# EAGLE board altair_brd (EAGLE 9.7.0)
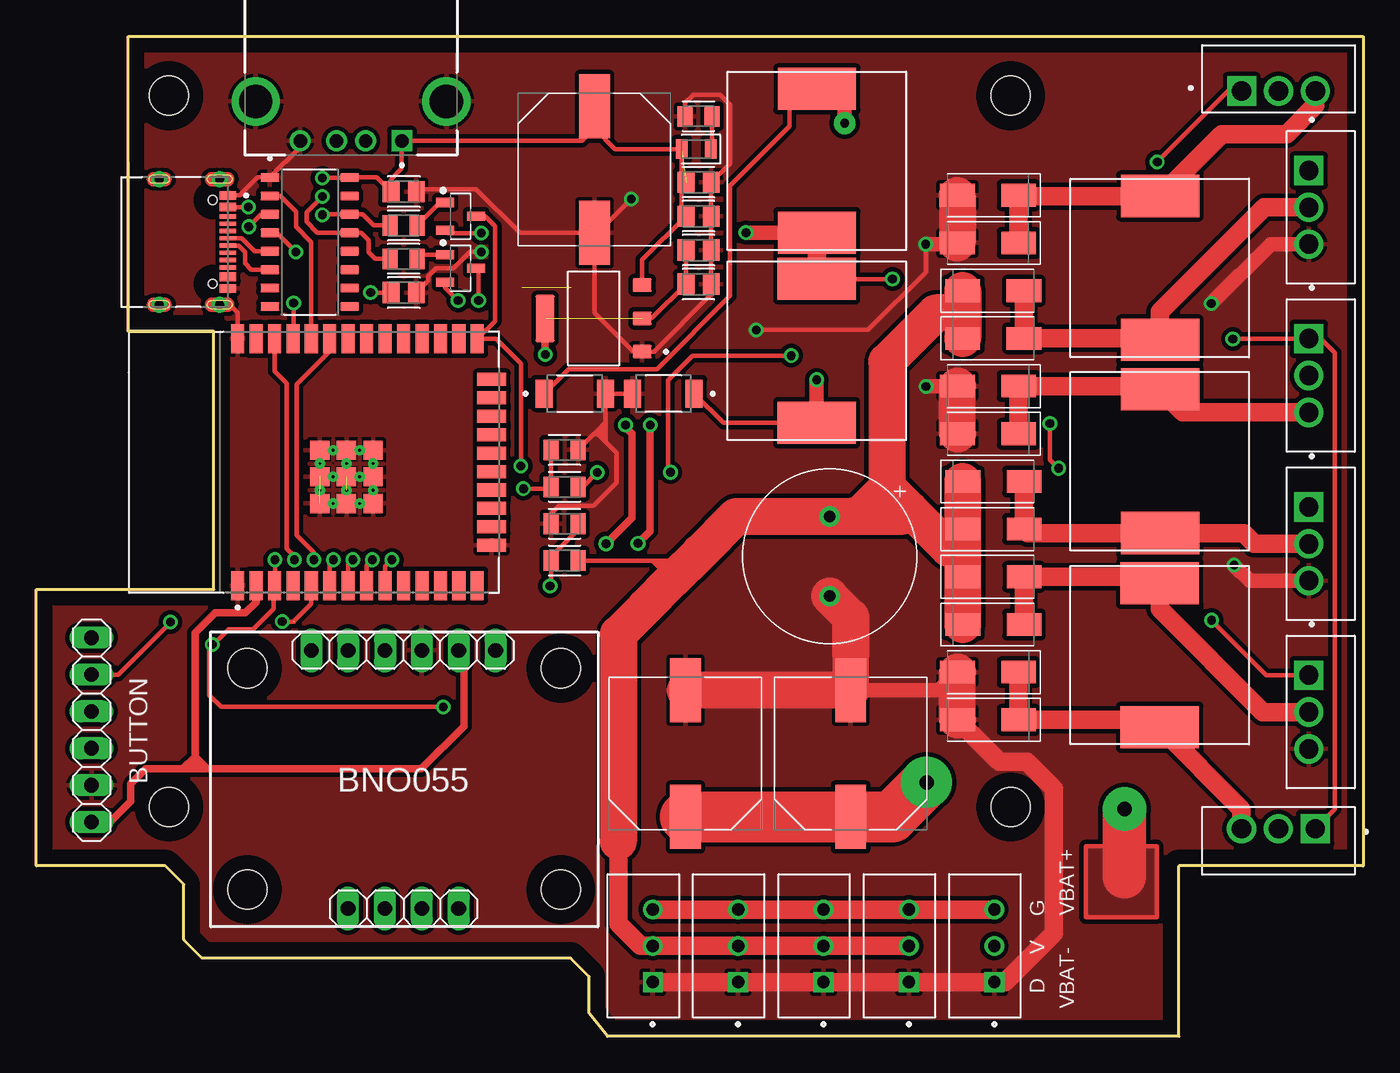
[diagram p0: board, top side]
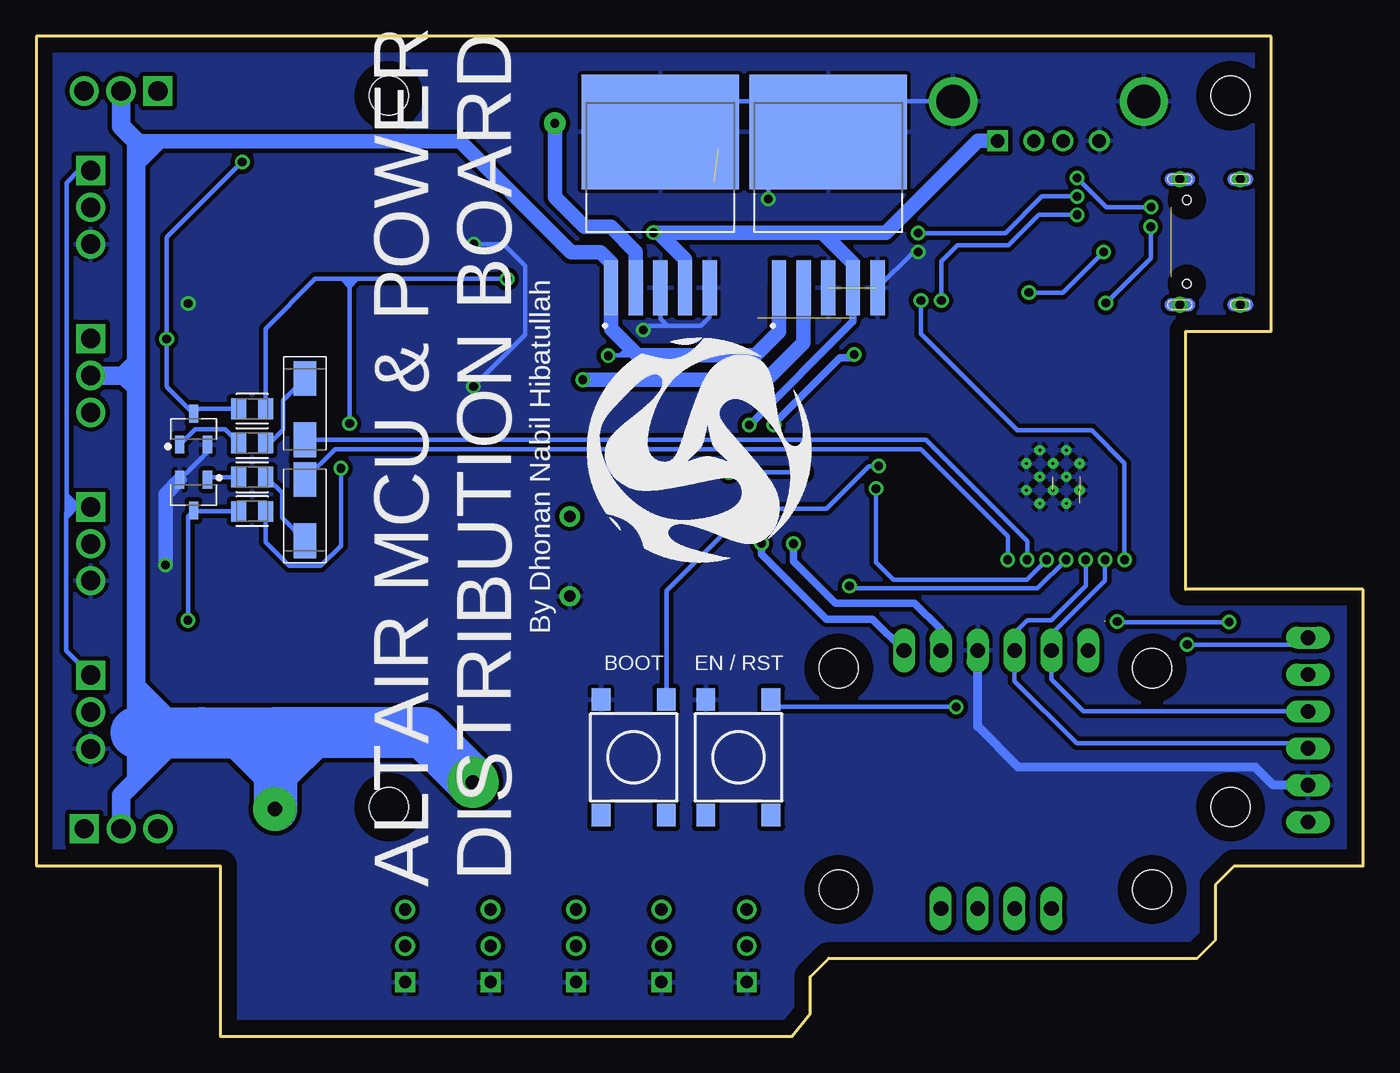
[diagram p1: board, bottom side, seen from below]

Size 91.44 x 68.9 mm. Coordinates in mm from the lower left corner, seen from the top.
Outline: 8.89,11.75 0,11.75 0,30.8 12.23,30.8 12.23,48.58 6.35,48.58 6.35,68.9 91.44,68.9 91.44,11.75 78.74,11.75 78.74,0 39.35,0 38.1,1.59 38.1,4.13 36.83,5.4 11.43,5.4 10.16,6.67 10.16,10.48 8.89,11.75
Copper layers (1*16): Top 0.035mm / dielectric 1.5mm / Bottom 0.035mm
Design rules "default": minimum track width 6mil, minimum drill 0.35mm, track to track 6mil, track to pad 6mil, pad to pad 6mil, via to via 6mil, smd to smd 6mil, copper to edge 40mil, drill to drill 6mil, minimum pad ring 10mil, minimum via ring 8mil, stop-mask expansion 4mil, vias tented up to drill 0mil, thermal gap 10mil
Holes 2.7 mm at 9.14,15.81 67.14,15.81 9.14,64.81 67.14,64.81 14.55,25.37 14.55,10.13 36.14,10.13 36.14,25.37

## Footprints (pad centres in the part's own frame; a part is rotated, then mirrored left to right if it is on the bottom)
CAPAE1030X1050N = smd 4.416 x 2.115: 1 -4.353,0; 2 4.353,0
CAPC2012X110 = smd 1.165 x 1.465: 1 -0.875,0; 2 0.875,0
CAPPRD550W60D1200H2000B = drill 0.8 pad 1.4: 1 -2.75,0; 2 2.75,0
SODFL4725X110N = smd 1.17 x 1.92: A 2.125,0; C -2.125,0
DIOM5226X290N = smd 2.392 x 1.565: 1 -2.108,0; 2 2.108,0
HRO_TYPE-C-31-M-12 = smd 0.6 x 1.14: A1_B12 -3.2,4.75; A4_B9 -2.4,4.75; B1_A12 3.2,4.75; B4_A9 2.4,4.75 | smd 0.3 x 1.14: A5 -1.25,4.75; A6 -0.25,4.75; A7 0.25,4.75; A8 1.25,4.75; B5 1.75,4.75; B6 0.75,4.75; B7 -0.75,4.75; B8 -1.75,4.75 | drill 0.6 pad 0.9: S1 -4.325,4.17; S2 4.325,4.17; S3 -4.325,0; S4 4.325,0 | hole 0.6: -2.89,3.68; 2.89,3.68
SAMTEC_USB-A-S-X-X-TH = drill 0.92 square: 01 -3.5,2.71 | drill 0.92: 02 -1,2.71; 03 1,2.71; 04 3.5,2.71 | drill 2.3: S1 -6.57,0; S2 6.57,0
MOLEX_22-03-5035 = drill 0.85 pad 1.28 square: 1 0,0 | drill 0.85 pad 1.28: 2 2.5,0; 3 5,0
1X06 = drill 1.016 long: 1 -6.35,0; 2 -3.81,0; 3 -1.27,0; 4 1.27,0; 5 3.81,0; 6 6.35,0
1X04 = drill 1.016 long: 1 -3.81,0; 2 -1.27,0; 3 1.27,0; 4 3.81,0
CDRH127R = smd 2.9 x 5.4: P$1 -1.27,0; P$2 8.634,0
LEDC2012X110N_G = smd 0.817 x 1.352: 1 -1,0 | smd 0.822 x 1.352: 2 0.998,0
TO254P1052X465X1989-3 = drill 1.34 pad 2.01 square: 1 0,0 | drill 1.34 pad 2.01: 2 2.54,0; 3 5.08,0
SOT95P237X112-3N = smd 1.224 x 0.625: 1 -1.064,0.95; 2 -1.064,-0.95; 3 1.064,0
RESC2012X65 = smd 1.031 x 1.42: 1 -0.919,0; 2 0.919,0
TACTILE_SWITCH_SMD_6.2MM_TALL = smd 1.55 x 1.3: A1 -3.975,-2.25; A2 3.975,-2.25; B1 -3.975,2.25; B2 3.975,2.25
MODULE_ESP32-WROOM-32D = smd 2 x 0.9: 1 -8.5,5.26; 2 -8.5,3.99; 3 -8.5,2.72; 4 -8.5,1.45; 5 -8.5,0.18; 6 -8.5,-1.09; 7 -8.5,-2.36; 8 -8.5,-3.63; 9 -8.5,-4.9; 10 -8.5,-6.17; 11 -8.5,-7.44; 12 -8.5,-8.71; 13 -8.5,-9.98; 14 -8.5,-11.25; 25 8.5,-11.25; 26 8.5,-9.98; 27 8.5,-8.71; 28 8.5,-7.44; 29 8.5,-6.17; 30 8.5,-4.9; 31 8.5,-3.63; 32 8.5,-2.36; 33 8.5,-1.09; 34 8.5,0.18; 35 8.5,1.45; 36 8.5,2.72; 37 8.5,3.99; 38 8.5,5.26 | smd 0.9 x 2: 15 -5.715,-12.25; 16 -4.445,-12.25; 17 -3.175,-12.25; 18 -1.905,-12.25; 19 -0.635,-12.25; 20 0.635,-12.25; 21 1.905,-12.25; 22 3.175,-12.25; 23 4.445,-12.25; 24 5.715,-12.25 | smd 1.33 x 1.33: 39_1 -2.835,-0.405; 39_2 -1,-0.405; 39_3 0.835,-0.405; 39_4 -2.835,-2.24; 39_5 -1,-2.24; 39_6 0.835,-2.24; 39_7 -2.835,-4.075; 39_8 -1,-4.075; 39_9 0.835,-4.075 | drill 0.2 pad 0.3: 39_10 -1.917,-0.405; 39_11 -0.083,-0.405; 39_12 -2.835,-1.323; 39_13 -1,-1.323; 39_14 0.835,-1.323; 39_15 -1.917,-2.24; 39_16 -0.083,-2.24; 39_17 -2.835,-3.158; 39_18 -1,-3.158; 39_19 0.835,-3.158; 39_20 -1.917,-4.075; 39_21 -0.083,-4.075
SOT229P700X180-4N = smd 1.31 x 0.93: 1 -3.345,2.29; 2 -3.345,0; 3 -3.345,-2.29 | smd 1.31 x 3.24: 4 3.345,0
SOIC127P600X180-16N = smd 1.31 x 0.62: 1 -2.75,4.445; 2 -2.75,3.175; 3 -2.75,1.905; 4 -2.75,0.635; 5 -2.75,-0.635; 6 -2.75,-1.905; 7 -2.75,-3.175; 8 -2.75,-4.445; 9 2.75,-4.445; 10 2.75,-3.175; 11 2.75,-1.905; 12 2.75,-0.635; 13 2.75,0.635; 14 2.75,1.905; 15 2.75,3.175; 16 2.75,4.445
TO170P1524X483-6N = smd 3.79 x 0.99: 1 -6.4,3.4; 2 -6.4,1.7; 3 -6.4,0; 4 -6.4,-1.7; 5 -6.4,-3.4 | smd 7.88 x 10.84: 6 4.35,0

## Placement (x,y rotation side)
C1  470u  [CAPAE1030X1050N]  56.12,19.49 90 top
C2  470u  [CAPAE1030X1050N]  44.73,19.49 90 top
C3  470u  [CAPAE1030X1050N]  38.46,59.71 270 top
C4  10u  [CAPC2012X110]  45.64,58.85 0 top
C5  100n  [CAPC2012X110]  45.64,56.51 0 top
C6  10u  [CAPC2012X110]  45.64,54.17 0 top
C7  100n  [CAPC2012X110]  45.64,51.83 0 top
C8  4.7m  [CAPPRD550W60D1200H2000B]  54.67,33.08 270 top
C9  100n  [CAPC2012X110]  25.32,51.24 0 top
C10  4.7u  [CAPC2012X110]  25.32,58.2 0 top
D1  1N5824  [SODFL4725X110N]  43.21,44.28 180 top
D2  1N5824  [SODFL4725X110N]  37.11,44.28 0 top
D3  SR5100  [DIOM5226X290N]  65.58,57.95 180 top
D4  SR5100  [DIOM5226X290N]  65.58,54.66 180 top
D5  SR5100  [DIOM5226X290N]  65.58,44.8 180 top
D6  SR5100  [DIOM5226X290N]  65.58,41.52 180 top
D7  SR5100  [DIOM5226X290N]  65.58,25.1 180 top
D8  SR5100  [DIOM5226X290N]  65.58,21.82 180 top
D9  SR5100  [DIOM5226X290N]  65.95,51.38 0 top
D10  SR5100  [DIOM5226X290N]  65.95,48.09 0 top
D11  SR5100  [DIOM5226X290N]  65.96,38.23 0 top
D12  SR5100  [DIOM5226X290N]  65.96,34.95 0 top
D13  SR5100  [DIOM5226X290N]  65.96,31.67 0 top
D14  SR5100  [DIOM5226X290N]  65.96,28.38 0 top
D15  1N5819  [DIOM5226X290N]  72.93,43.21 270 bottom
D16  1N5819  [DIOM5226X290N]  72.93,36.26 90 bottom
J1  TYPE-C-31-M-12  [HRO_TYPE-C-31-M-12]  8.47,54.73 270 top
J2  USB-A-S-X-X-TH  [SAMTEC_USB-A-S-X-X-TH]  21.69,64.41 180 top
J3  22-03-5035  [MOLEX_22-03-5035]  66.02,3.74 90 top
J4  22-03-5035  [MOLEX_22-03-5035]  42.47,3.74 90 top
J5  22-03-5035  [MOLEX_22-03-5035]  48.36,3.74 90 top
J6  22-03-5035  [MOLEX_22-03-5035]  54.25,3.74 90 top
J7  22-03-5035  [MOLEX_22-03-5035]  60.13,3.74 90 top
JP1  PINHD-1X6  [1X06]  25.3,26.59 180 top
JP2  PINHD-1X4  [1X04]  25.3,8.81 0 top
JP3  PINHD-1X6  [1X06]  3.81,21.12 90 top
L1  33u  [CDRH127R]  53.78,43.55 90 top
L2  33u  [CDRH127R]  53.79,64.01 270 top
L3  330u  [CDRH127R]  77.43,56.63 270 top
L4  330u  [CDRH127R]  77.43,43.31 270 top
L5  330u  [CDRH127R]  77.41,22.58 90 top
LED1  LED_CHIPGREEN-2012  [LEDC2012X110N_G]  45.48,61.13 180 top
Q1  IRF9540  [TO254P1052X465X1989-3]  83.06,65.13 0 top
Q2  IRF9540  [TO254P1052X465X1989-3]  87.69,48.07 270 top
Q3  IRF9540  [TO254P1052X465X1989-3]  88.14,14.31 180 top
Q4  IRF9540  [TO254P1052X465X1989-3]  87.69,59.66 270 top
Q5  IRF9540  [TO254P1052X465X1989-3]  87.69,36.48 270 top
Q6  IRF9540  [TO254P1052X465X1989-3]  87.69,24.89 270 top
Q7  NPN  [SOT95P237X112-3N]  29.24,52.91 0 top
Q8  NPN  [SOT95P237X112-3N]  29.24,56.5 0 top
Q9  NPN  [SOT95P237X112-3N]  80.6,41.84 90 bottom
Q10  NPN  [SOT95P237X112-3N]  80.6,37.29 270 bottom
R1  470  [RESC2012X65]  45.64,63.39 180 top
R2  300k  [RESC2012X65]  36.41,32.78 180 top
R3  47k  [RESC2012X65]  36.41,35.32 180 top
R4  300k  [RESC2012X65]  36.41,37.86 180 top
R5  47k  [RESC2012X65]  36.41,40.4 0 top
R6  10k  [RESC2012X65]  25.32,53.57 0 top
R7  10k  [RESC2012X65]  25.32,55.87 0 top
R8  5k  [RESC2012X65]  76.56,40.88 180 bottom
R9  5k  [RESC2012X65]  76.56,38.53 180 bottom
R10  10k  [RESC2012X65]  76.56,36.18 0 bottom
R11  10k  [RESC2012X65]  76.56,43.24 0 bottom
S1  MOMENTARY-SWITCH-SPST-SMD-6.2MM-TALL  [TACTILE_SWITCH_SMD_6.2MM_TALL]  43.05,19.23 90 bottom
S2  MOMENTARY-SWITCH-SPST-SMD-6.2MM-TALL  [TACTILE_SWITCH_SMD_6.2MM_TALL]  50.28,19.23 90 bottom
U1  ESP32-WROOM-32D  [MODULE_ESP32-WROOM-32D]  19.14,39.55 90 top
U2  AMS1117-3.3  [SOT229P700X180-4N]  38.4,49.46 180 top
U3  CH340C  [SOIC127P600X180-16N]  18.85,54.73 0 top
VR1  LM2596S-5.0  [TO170P1524X483-6N]  36.86,57.96 90 bottom
VR2  LM2596S-5.0  [TO170P1524X483-6N]  48.44,57.96 90 bottom

## Library data of the parts
C1-C10 = Capacitor; CATEGORY: Capacitor
D1 D2 = MY-SS54; AVAILABILITY: In Stock; CHECK_PRICES: https://www.snapeda.com/parts/SS54FSH/Taiwan+Semiconductor/view-part/?ref=eda; DESCRIPTION: 5A, 40V, Schottky Rectifier; MF: Taiwan Semiconductor; MP: SS54FSH; PACKAGE: SOD-128-2 Taiwan Semiconductor; PRICE: None; SNAPEDA_LINK: https://www.snapeda.com/parts/SS54FSH/Taiwan+Semiconductor/view-part/?ref=snap
D3-D14 = Diode; CATEGORY: Diode; SUB-CATEGORY: Zener
D15 D16 = Diode; CATEGORY: Diode; SUB-CATEGORY: Rectifier
J1 = MY-USB-TYPE-C; AVAILABILITY: Not in stock; CHECK_PRICES: https://www.snapeda.com/parts/TYPE-C-31-M-12/HRO+Electronics+Co.%252C+Ltd./view-part/?ref=eda; DESCRIPTION: USB Connectors 24 Receptacle 1 8.94*7.3mm RoHS; MF: HRO Electronics Co., Ltd.; MP: TYPE-C-31-M-12; PACKAGE: Package; PRICE: None; SNAPEDA_LINK: https://www.snapeda.com/parts/TYPE-C-31-M-12/HRO+Electronics+Co.%252C+Ltd./view-part/?ref=snap
J2 = MY-USB-TYPE-A; AVAILABILITY: In Stock; CHECK_PRICES: https://www.snapeda.com/parts/USB-A-S-S-W-TH/Samtec+Inc./view-part/?ref=eda; DESCRIPTION: USB-A (USB TYPE-A) USB 2.0 Receptacle Connector 4 Position Through Hole, Right Angle; MF: Samtec; MP: USB-A-S-S-W-TH; PACKAGE: None; PRICE: None; SNAPEDA_LINK: https://www.snapeda.com/parts/USB-A-S-S-W-TH/Samtec+Inc./view-part/?ref=snap
J3-J7 = MOLEX-22-03-5035; AVAILABILITY: In Stock; CHECK_PRICES: https://www.snapeda.com/parts/22-03-5035/Molex/view-part/?ref=eda; DESCRIPTION: Conn Shrouded Header HDR 3 POS 2.5mm Solder ST Thru-Hole Bag | Molex Incorporated 22-03-5035; MF: Molex; MP: 22-03-5035; PACKAGE: None; PRICE: None; PURCHASE-URL: https://www.snapeda.com/api/url_track_click_mouser/?unipart_id=451887&manufacturer=Molex&part_name=22-03-5035&search_term=22-03-5035; SNAPEDA_LINK: https://www.snapeda.com/parts/22-03-5035/Molex/view-part/?ref=snap
JP1 JP3 = Connector; CATEGORY: Headers; DESCRIPTION: Header, Straight, 6 Position; MANUFACTURER: Generic; MPN: Generic; OPERATING_TEMPERATURE: Generic; PART_STATUS: Active; PITCH: 0.100" (2.54mm); ROHS_COMPLIANCE: Generic; SERIES: Generic; SUB-CATEGORY: Headers, Male Pins; TYPE: Board to Board or Cable, Unshrouded, Through Hole, Straight
JP2 = Connector; CATEGORY: Headers; DESCRIPTION: Header, Straight, 4 Position; MANUFACTURER: Generic; MPN: Generic; OPERATING_TEMPERATURE: Generic; PART_STATUS: Active; PITCH: 0.100" (2.54mm); ROHS_COMPLIANCE: Generic; SERIES: Generic; SUB-CATEGORY: Headers, Male Pins; TYPE: Board to Board or Cable, Unshrouded, Through Hole, Straight
L1-L5 = MY-CDRH127R
LED1 = Tutorial - Fusion 360; CATEGORY: Opto-Electronic; COLOR: Green; SUB-CATEGORY: LED
Q1-Q6 = MY-IRF9540; AVAILABILITY: In Stock; CHECK_PRICES: https://www.snapeda.com/parts/IRF9540/Vishay+Siliconix/view-part/?ref=eda; DESCRIPTION: P-Channel 100 V 19A (Tc) 3.7W (Ta), 150W (Tc) Surface Mount D²PAK (TO-263); MF: Vishay Siliconix; MP: IRF9540; PACKAGE: TO-220-3 Vishay; PRICE: None; PURCHASE-URL: https://www.snapeda.com/api/url_track_click_mouser/?unipart_id=1087953&manufacturer=Vishay Siliconix&part_name=IRF9540&search_term=None; SNAPEDA_LINK: https://www.snapeda.com/parts/IRF9540/Vishay+Siliconix/view-part/?ref=snap
Q7-Q10 = Transistor; CATEGORY: Transistor; SUB-CATEGORY: BJT; TYPE: NPN
R1-R11 = Resistor; CATEGORY: Resistor; SUB-CATEGORY: Fixed
S1 S2 = SparkFun-Switches; PROD_ID: SWCH-11966; SF_SKU: COM-12992
U1 = MY-ESP32-WROOM-32D; AVAILABILITY: In Stock; CHECK_PRICES: https://www.snapeda.com/parts/ESP32-WROOM-32D/Espressif+Systems/view-part/?ref=eda; DESCRIPTION: Bluetooth, WiFi 802.11b/g/n, Bluetooth v4.2 +EDR, Class 1, 2 and 3 Transceiver Module 2.4GHz ~ 2.5GHz Integrated; MF: Espressif Systems; MP: ESP32-WROOM-32D; PACKAGE: Non Standard Espressif Systems; PRICE: None; SNAPEDA_LINK: https://www.snapeda.com/parts/ESP32-WROOM-32D/Espressif+Systems/view-part/?ref=snap
U2 = MY-AMS1117; AVAILABILITY: Not in stock; CHECK_PRICES: https://www.snapeda.com/parts/AMS1117-3.3/Advanced+Monolithic+Systems/view-part/?ref=eda; DESCRIPTION: Sot223/Pkg 1-Amp 3.3-Volt Low Drop Out Voltage Regulatator; MF: Advanced Monolithic Systems; MP: AMS1117-3.3; PACKAGE: SOT-223 Seeed Technology; PRICE: None; SNAPEDA_LINK: https://www.snapeda.com/parts/AMS1117-3.3/Advanced+Monolithic+Systems/view-part/?ref=snap
U3 = MY-CH340C; AVAILABILITY: Not in stock; CHECK_PRICES: https://www.snapeda.com/parts/CH340C/WCH/view-part/?ref=eda; DESCRIPTION: USB to serial chip CH340; MF: WCH; MP: CH340C; PACKAGE: None; PRICE: None; SNAPEDA_LINK: https://www.snapeda.com/parts/CH340C/WCH/view-part/?ref=snap
VR1 VR2 = MY-LM2596S; AVAILABILITY: In Stock; CHECK_PRICES: https://www.snapeda.com/parts/LM2596S-5.0/NOPB/Texas+Instruments/view-part/?ref=eda; DESCRIPTION: SIMPLE SWITCHER&reg; 4.5V to 40V, 3A Low Component Count Step-Down Regulator; MF: Texas Instruments; MP: LM2596S-5.0/NOPB; PACKAGE: TO-263-5 Texas Instruments; PRICE: None; SNAPEDA_LINK: https://www.snapeda.com/parts/LM2596S-5.0/NOPB/Texas+Instruments/view-part/?ref=snap

## Nets
3V3: C6.1 C7.1 JP1.2 JP3.1 U1.2 U2.2 U2.4
5V: C3.1 C4.1 C5.1 C10.1 J1.A4_B9 J1.B4_A9 J2.01 JP1.1 L1.P$2 L2.P$2 LED1.2 R10.2 R11.2 U2.3 U3.16 VR1.4 VR2.4
14V: C8.1 D9.1 D10.1 D11.1 D12.1 D13.1 D14.1 J4.2 J5.2 J6.2 J7.2 R2.1
BTN_INT: JP3.5 U1.5
DATA: J3.3 J4.3 J5.3 J6.3 J7.3
ESP_EN: JP3.6 Q7.3 S1.A2 U1.3
ESP_IO0: Q8.3 S2.A2 U1.25
ESP_RX: U1.34 U3.2
ESP_TX: U1.35 U3.3
GND: C1.2 C2.2 C3.2 C4.2 C5.2 C6.2 C7.2 C8.2 C9.2 C10.2 D1.A D2.A D3.2 D4.2 D5.2 D6.2 D7.2 D8.2 J1.A1_B12 J1.B1_A12 J1.S1 J1.S2 J1.S3 J1.S4 J2.04 J2.S1 J2.S2 J3.1 J4.1 J5.1 J6.1 J7.1 JP1.3 JP3.2 Q4.3 Q5.3 Q6.3 Q9.2 Q10.2 R1.2 R3.2 R5.2 S1.B2 S2.B2 U1.1 U1.15 U1.38 U1.39_1 U1.39_2 U1.39_3 U1.39_4 U1.39_5 U1.39_6 U1.39_7 U1.39_8 U1.39_9 U1.39_10 U1.39_11 U1.39_12 U1.39_13 U1.39_14 U1.39_15 U1.39_16 U1.39_17 U1.39_18 U1.39_19 U1.39_20 U1.39_21 U2.1 U3.1 VR1.3 VR1.5 VR1.6 VR2.3 VR2.5 VR2.6
N$1: D1.C L1.P$1 VR1.2
N$2: LED1.1 R1.1
N$3: D3.1 D4.1 L3.P$1 Q1.3
N$4: D2.C L2.P$1 VR2.2
N$5: D5.1 D6.1 L4.P$1 Q2.3
N$6: D7.1 D8.1 L5.P$1 Q3.3
N$7: D9.2 D10.2 L3.P$2 Q4.2
N$8: D11.2 D12.2 L4.P$2 Q5.2
N$9: D13.2 D14.2 L5.P$2 Q6.2
N$10: R4.2 R5.1 U1.7
N$11: R2.2 R3.1 U1.6
N$12: C9.1 U3.4
N$13: J1.A6 U3.5
N$14: J1.A7 U3.6
N$15: Q7.2 R7.1 U3.14
N$16: Q8.2 R6.1 U3.13
N$17: Q7.1 R6.2
N$18: Q8.1 R7.2
N$19: D15.2 U1.8
N$20: D15.1 R8.1
N$21: D16.2 U1.9
N$22: D16.1 R9.1
N$23: Q10.1 R9.2
N$24: Q9.1 R8.2
S_BOOST: Q4.1 Q5.1 Q6.1 Q10.3 R10.1
S_BUCK: Q1.1 Q2.1 Q3.1 Q9.3 R11.1
SCL: JP1.5 JP3.4 U1.36
SDA: JP1.4 JP3.3 U1.33
VBAT: C1.1 C2.1 Q1.2 Q2.2 Q3.2 R4.1 VR1.1 VR2.1

## Tracks (layer width: path | path; a pad name or v marks a point on that pad's centre or on a via)
3V3  (via drill 0.6)  (1 unrouted)
  Top 0.305: C6.1 C7.1 42.39,49.46 U2.2
  Top 0.508: JP3.1 5.07,14.77 6.52,16.22 6.52,17.39 7.55,18.43 10.09,18.43 | 10.09,18.43 10.94,18.43 | 10.94,18.43 11.79,18.43 | 11.79,18.43 26.53,18.43 29.48,21.37 29.48,26.22 JP1.2 | 10.94,19.28 10.94,27.8 12.31,29.17 14.4,29.17 15.15,29.92 U1.2 | 10.94,19.27 10.94,18.43 | 10.94,19.28 10.09,18.43 | 10.94,19.28 10.94,19.27 | 10.94,19.27 11.79,18.43 | U2.4 35.06,47.01 v35.08,46.98 | v40.61,42.12 40.61,41.98 41.06,41.52 41.06,35.75 v39.26,33.95
  Bottom 0.508: v35.08,46.98 35.31,46.75 36.05,46.75 40.61,42.2 v40.61,42.12 | v39.26,33.95 39.26,32.73 36.38,29.85 30.92,29.85 29.11,28.04 JP1.2
5V  (via drill 0.6, 0.6 pad 1)  (2 unrouted)
  Top 0.305: J1.A4_B9 v14.62,57.13 | v19.72,59.14 21.56,59.14 U3.16 23.46,59.17 C10.1 24.44,59.06 25.19,59.81 J2.01 37.61,61.7 38.46,62.55 | U2.3 41.75,53.49 C5.1 44.48,56.79 LED1.2 39.89,61.13 38.46,62.55 | 38.46,62.55 38.46,62.03 | 38.46,62.55 C3.1 | 53.7,55.47 L2.P$2 | v59,52.18 53.79,52.18 L1.P$2 | v69.85,42.23 69.85,39.74 v70.45,39.14
  Top 0.508: v42.3,42.12 42.3,34.81 v41.47,33.97
  Top 1.016: v48.9,55.37 L2.P$2 53.88,55.45
  Top 1.27: L2.P$2 53.79,52.2 L1.P$2
  Bottom 0.305: v14.62,57.13 17.72,57.13 v19.72,59.14 | 46.75,53.66 46.75,53.54 46.75,51.57 VR2.4 | R11.2 75.64,48.77 72.21,52.19 70.38,52.19 | 70.38,52.19 69.85,52.19 | 69.32,52.19 69.85,52.19 | 69.32,52.19 59.01,52.19 v59,52.18 | R10.2 75.64,34.06 74,32.42 71.84,32.42 70.45,33.82 v70.45,39.14 | v69.85,42.23 69.85,51.66 | 69.85,52.19 69.85,51.66 | 70.38,52.19 69.85,51.66 | 69.32,52.19 69.85,51.66
  Bottom 0.508: VR1.4 35.16,49.26 v42.3,42.12 | v41.47,33.97 41.47,33.23 36.98,28.75 33.81,28.75 JP1.1
  Bottom 1.016: 46.75,53.54 48.58,55.37 v48.9,55.37 37.26,55.37 | 37.26,55.37 35.16,53.27 VR1.4 | 37.26,55.37 32.88,55.37 26.56,61.7 J2.01
14V
  Top 0.2: D13.1 63.85,32.07 63.85,33.63
  Top 0.305: R2.1 42.47,32.78 | 42.98,32.78 42.47,32.78 | 42.98,32.78 43.18,32.78 | 43.18,32.78 45.17,32.78 45.72,33.34 | 43.82,31.43 43.18,32.07 | 43.18,32.07 43.18,32.78 | 43.18,32.07 42.98,32.27 | 42.98,32.78 42.98,32.27 | 42.47,32.78 42.98,32.27
  Top 1.016: 57.15,35.83 57.15,35.85 | 56.27,35.85 56.27,36.51 58.32,38.56
  Top 1.27: J6.2 J4.2 41.63,6.24 40.11,7.76 40.11,13.43 | J7.2 J6.2 | J5.2 J6.2 | D12.1 63.85,32.07
  Top 2.54: D14.1 63.85,32.07 63.85,33.63 | 63.85,33.63 D11.1 | D9.1 63.85,49.85 | 63.85,49.85 D10.1 | 63.85,49.85 61.99,49.85 58.62,46.48 58.62,37.87 60.19,36.3 | 63.85,33.63 62.86,33.63 60.19,36.3 | 57.15,35.83 C8.1 48.22,35.83 45.72,33.34 43.82,31.43 41.97,29.58 40.11,27.72 40.11,13.43 | 56.27,35.85 57.15,35.85 59.74,35.85 60.19,36.3
BTN_INT  (via drill 0.6)  (1 unrouted)
  Top 0.305: JP3.5 5.64,24.93 v9.25,28.54 | 17.78,28.58 v16.95,28.58 | U1.5 18.96,29.8 17.78,28.62
  Bottom 0.305: v9.25,28.54 16.91,28.54 v16.95,28.58
DATA
  Top 1.27: J3.3 J7.3 J6.3 J5.3 J4.3
ESP_EN  (via drill 0.6)
  Top 0.305: Q7.3 30.48,52.73 v30.48,50.69 | v16.45,32.84 16.45,31.08 U1.3 16.36,30.99 16.36,29.47 14.93,28.05 13.24,28.05 12.16,26.96 | v28.05,22.7 12.73,22.7 11.91,23.52 11.91,26.71 12.16,26.96 | 12.16,26.96 | 12.16,26.96 v12.13,27
  Bottom 0.305: v30.48,50.69 30.48,48.39 23.83,41.74 18.69,41.74 16.45,39.5 v16.45,32.84 | v28.05,22.7 40.3,22.7 S1.A2 | JP3.6 4.28,27 v12.13,27
ESP_IO0  (via drill 0.6)
  Top 0.305: Q8.3 30.93,56.5 31.61,55.83 31.61,49.28 U1.25 31.69,48.05 33.39,46.35 v33.39,39.3
  Bottom 0.305: v33.39,39.3 34.05,39.3 36.99,36.36 42.37,36.36 48.03,30.7 S2.A2
ESP_RX
  Top 0.305: U3.2 16.81,57.9 17.89,56.82 17.89,55.77 18.96,54.7 U1.34
ESP_TX  (via drill 0.6)
  Top 0.305: U3.3 15.5,56.63 v14.64,55.78 | v17.73,50.53 17.73,48.1 U1.35
  Bottom 0.305: v14.64,55.78 14.64,53.62 v17.73,50.53
GND  (via drill 0.6)  (4 unrouted)
  Top 0.305: J1.A1_B12 14.02,57.93 15.26,59.17 U3.1 18.19,61.27 J2.04 | C9.2 27,52.06 27,52.38 27.54,52.92 28.75,52.92 29.88,54.05 v30.66,54.05 | C10.2 26.37,58.37 30.32,58.37 33.33,55.36 C3.2 | R1.2 44.72,64.31 45.28,64.87 47.1,64.87 47.79,64.18 47.79,60.12 C4.2 C7.2 46.51,51.12 42.56,47.17 U2.1 41.16,47.17 38.46,49.87 C3.2 | U1.38 13.88,49.85 13.43,50.29 | v41,57.68 38.68,55.36 C3.2 | D1.A D2.A 39.23,42.31 | R5.2 38.41,41.49 | 38.41,41.49 38.63,41.7 | 38.63,41.7 39.23,42.31 | R3.2 35.49,36.03 36.03,36.57 38.4,36.57 39.97,38.14 39.97,40.22 39.23,40.96 | 39.23,41.92 39.23,41.24 | 38.63,41.7 38.63,41.56 38.67,41.52 | 39.23,40.96 38.75,41.44 | 38.75,41.44 38.67,41.52 | 39.23,42.31 39.23,41.92 | 38.75,41.44 38.89,41.58 | 38.89,41.58 39.23,41.92 | 39.23,40.96 39.23,41.24 | 39.23,41.24 38.89,41.58 | 38.67,41.52 38.63,41.49 38.41,41.49 | v49.62,48.67 57.3,48.67 61.29,52.66 v61.29,54.57
  Top 1.016: C1.2 62.21,23.84 D7.2 | Q5.3 83.61,31.4 v82.53,32.47 | Q4.3 85.06,54.58 v80.97,50.49 | D5.2 61.34,44.8 v61.31,44.78 | D4.2 63.38,54.57 v61.29,54.57
  Top 1.27: J4.1 J3.1 66.76,3.74 70.14,7.12 70.14,17.05 68.27,18.92 66.37,18.92 D8.2
  Top 2.54: C8.2 56.12,28.89 C1.2 C2.2 | D6.2 D5.2 | D8.2 D7.2 | D3.2 D4.2
  Bottom 0.305: 33.02,63.82 32.43,64.41 J2.S1 43.86,64.41 44.45,63.82 | v41,57.68 41,59.25 41.26,59.51 | Q10.2 79.65,40.25 Q9.2 | v30.66,54.05 30.98,54.05 VR1.5 | VR2.5 45.04,49.53 45.63,48.94 47.95,48.94 | 47.95,48.94 48.44,49.43 VR2.3 | 47.95,48.94 49.35,48.94 v49.62,48.67 | v61.31,44.78 57.76,48.33 57.76,53.09 59.24,54.57 v61.29,54.57
  Bottom 0.61: JP3.2 6.2,17.31 7.44,18.55 23.77,18.55 26.57,21.36 JP1.3
  Bottom 1.016: v82.53,32.47 82.53,37.37 Q10.2
  pour Top (isolate 0.305): -4.15,-1.96 95.63,-1.96 95.63,72.06 -4.15,72.06
  pour Bottom (isolate 0.305): -5.75,-3.91 97.52,-3.91 97.52,73.76 -5.75,73.76
N$1  (via drill 0.6)
  Top 0.305: D1.C 47.34,42.28 L1.P$1
  Top 1.016: v53.78,45.24 L1.P$1
  Bottom 1.016: VR1.2 38.56,47.78 41.11,45.24 v53.78,45.24 | v53.78,45.24
N$2
  Top 0.305: LED1.1 46.56,61.2 R1.1
N$3
  Top 1.27: Q1.3 88.14,64.15 86.16,62.17 81.7,62.17 L3.P$1 67.74,57.9 | 67.74,57.9 D3.1 | D4.1 67.69,57.84 67.74,57.9
N$4  (via drill 0.6 pad 1.5)
  Top 0.305: D2.C 36.67,45.97 42.78,45.97 47.82,51.02 47.82,58.61 51.91,62.71 51.91,64.93 | 51.91,64.93 52.07,65.09 | 51.91,64.93 53.79,64.93 L2.P$1 53.79,65.05 55.71,65.05
  Top 1.016: v55.71,62.91 55.71,65.05 55.57,65.18
  Bottom 1.016: VR2.2 50.14,54.07 51.85,55.78 53.68,55.78 55.71,57.81 v55.71,62.91
N$5
  Top 1.27: D6.1 D5.1 77.21,44.8 L4.P$1 79.03,42.99 Q2.3
N$6
  Top 1.27: D7.1 D8.1 76.9,21.82 L5.P$1 83.06,15.66 Q3.3
N$7
  Top 1.27: D9.2 D10.2 77.33,48.09 L3.P$2 77.43,49.92 84.63,57.12 Q4.2
N$8
  Top 1.27: D11.2 D12.2 68.34,34.68 L4.P$2 83.2,34.68 83.94,33.94 Q5.2
N$9
  Top 1.27: D14.2 D13.2 75.33,31.67 76.2,30.8 77,30.8 L5.P$2 77.41,29.46 84.53,22.35 Q6.2
N$10  (via drill 0.6)
  Top 0.305: U1.7 21.5,32.52 v21.81,32.84 | v33.57,37.74 35.36,37.74 R4.2 R5.1
  Bottom 0.305: v21.81,32.84 23.18,31.47 32.36,31.47 33.57,32.68 v33.57,37.74
N$11  (via drill 0.6)
  Top 0.305: R3.1 37.33,34.9 35.49,33.06 R2.2 35.49,31.12 v35.4,31.03 | U1.6 20.23,32.59 v20.47,32.84
  Bottom 0.305: v20.47,32.84 22.44,30.87 35.24,30.87 v35.4,31.03
N$12  (via drill 0.6)
  Top 0.305: U3.4 16.56,55.36 v17.89,54.03 | C9.1 v23.04,51.24 v23.04,51.25
  Bottom 0.305: v17.89,54.03 20.68,51.25 v23.04,51.25
N$13
  Top 0.305: J1.A6 14.15,54.98 15.04,54.09 U3.5
N$14
  Top 0.305: J1.A7 13.93,54.48 14.39,54.02 14.39,53.26 14.82,52.82 U3.6
N$15  (via drill 0.6)
  Top 0.305: R7.1 23.26,55.87 22.5,56.63 U3.14 19.76,56.63 v19.72,56.6 | v29.07,50.69 28.17,51.58 Q7.2
  Bottom 0.305: v19.72,56.6 22.36,56.6 24.47,54.5 27.97,54.5 29.07,53.4 v29.07,50.69
N$16  (via drill 0.6)
  Top 0.305: R6.1 23.35,53.57 22.91,54.01 22.91,54.85 22.4,55.36 U3.13 19.37,55.36 18.62,56.11 18.62,56.76 v19.72,57.87 | v30.66,55.34 28.38,55.34 Q8.2
  Bottom 0.305: v19.72,57.87 22.13,57.87 24.66,55.34 v30.66,55.34
N$17
  Top 0.305: R6.2 26.53,53.86 Q7.1
N$18
  Top 0.305: R7.2 27.82,57.45 Q8.1
N$19  (via drill 0.6)
  Top 0.305: U1.8 22.77,32.45 v23.15,32.84
  Bottom 0.305: D15.2 30.13,41.11 23.15,34.13 v23.15,32.84
N$20
  Bottom 0.305: D15.1 74.44,43.82 74.44,41.79 75.34,40.88 R8.1
N$21  (via drill 0.6)
  Top 0.305: U1.9 24.04,32.38 v24.49,32.84
  Bottom 0.305: D16.2 70.86,40.45 30.49,40.45 24.49,34.45 v24.49,32.84
N$22
  Bottom 0.305: D16.1 74.51,35.73 74.51,37.44 75.6,38.53 R9.1
N$23
  Bottom 0.305: Q10.1 79.47,38.53 R9.2
N$24
  Bottom 0.305: 77.63,40.88 R8.2 78.43,41.84 80.48,41.84 Q9.1
S_BOOST  (via drill 0.6)
  Top 0.305: v80.98,28.68 84.77,24.89 Q6.1
  Bottom 0.305: R10.1 80.55,36.18 Q10.3 80.98,35.84 v80.98,28.68 | Q6.1 89.37,26.57 89.37,35.77 | 89.36,35.78 88.66,36.48 Q5.1 88.52,36.48 88.76,36.72 | 89.36,37.32 88.76,36.72 | 89.36,37.32 89.36,58.8 88.5,59.66 Q4.1 | 89.36,37.32 89.36,37.15 | 89.36,37.15 89.36,35.78 | 89.36,35.78 89.37,35.77 | 89.37,35.77 89.37,36.12 89.08,36.41 | 89.08,36.41 88.76,36.72 | 89.36,37.15 89.08,36.87 89.08,36.41
S_BUCK  (via drill 0.6)
  Top 0.305: v82.45,48.05 87.67,48.05 Q2.1 88.53,48.07 89.49,47.11 89.49,15.66 Q3.1 | v77.25,60.25 82.13,65.13 Q1.1
  Bottom 0.305: R11.1 80.26,43.24 Q9.3 82.45,44.76 v82.45,48.05 82.45,55.04 v77.25,60.25
SCL  (via drill 0.6)
  Top 0.305: U1.36 16.42,45.83 17.26,44.99 17.26,33.61 17.79,33.08 v17.79,32.84
  Bottom 0.305: JP3.4 19.28,22.39 21.49,24.6 JP1.5 21.49,27.7 17.79,31.4 v17.79,32.84
SDA  (via drill 0.6)
  Top 0.305: U1.33 20.23,47.21 17.96,44.94 17.96,34.54 19.13,33.37 v19.13,32.84
  Bottom 0.305: JP3.3 4.14,20.18 19.74,20.18 24.03,24.47 JP1.4 24.03,27.77 23.13,28.67 21.49,28.67 19.13,31.03 v19.13,32.84
VBAT  (via drill 0.6, 1 pad 3, 1 pad 3.5)
  Top 0.305: R4.1 37.66,37.86 v38.65,38.85 | v52.03,46.9 45.22,46.9 43.54,45.22 43.54,39.03 v43.7,38.87 | 74.98,13.11 77.22,13.11 77.22,8.21 73.26,8.21 73.03,8.21 72.32,8.21 72.32,8.92 72.32,13.1 72.85,13.1 73.21,13.1 74.98,13.1
  Top 3: v74.98,15.66 74.98,13.11 74.98,13.1 74.98,11 74.99,11
  Top 3.5: C2.1 C1.1 58.96,15.13 v61.34,17.51
  Bottom 0.305: 49.53,46.93 51.16,46.93 | 51.16,46.93 52,46.93 v52.03,46.9 | 50.6,47.51 51.16,46.95 51.16,46.93 | v43.7,38.87 38.67,38.87 v38.65,38.85
  Bottom 1.016: VR1.1 40.26,48.55 41.89,46.93 49.53,46.93 50.02,46.93 50.6,47.51 51.85,48.75 VR2.1 51.84,53.31 52.56,54.03 54.59,54.03 62.23,61.67 82.9,61.67 | 82.9,61.67 84.56,61.67 | 84.56,60.01 82.9,61.67
  Bottom 1.27: Q1.2 85.6,62.71 84.56,61.67 84.56,60.01 84.56,46.42 | 84.56,46.42 85.45,45.53 | 85.45,45.53 Q2.2 | Q3.2 85.6,16.62 84.56,17.66 | 84.56,17.66 84.56,20.93 84.56,24.13 | 84.56,24.13 84.56,44.67 | 84.56,44.67 84.56,46.42 | 85.45,45.53 85.41,45.53 84.56,44.67 | 84.56,17.66 82.22,20 82.22,20.24 | 82.55,20.93 82.55,22.12 84.56,24.13
  Bottom 3: 74.93,20.93 74.93,18.1 | 74.93,18.1 74.93,15.66 v74.98,15.66 | 74.93,18.1 72.1,20.93 71.87,20.93 | 80.01,20.93 77.76,20.93 74.93,18.1
  Bottom 3.5: v61.34,17.51 64.76,20.93 71.87,20.93 74.93,20.93 80.01,20.93 82.55,20.93 84.56,20.93
  pour Top: 72.61,8.57 76.97,8.57 76.97,12.83 72.61,12.83

## Text on the board
tPlace: BUTTON | BNO055 | VBAT+ | D V G | VBAT-
bPlace: By Dhonan Nabil Hibatullah | ALTAIR MCU & POWER / DISTRIBUTION BOARD | EN / RST | BOOT